# EAGLE board prelab-final (EAGLE 9.7.0)

Size 95.12 x 36.68 mm. Coordinates in mm from the lower left corner, seen from the top.
Outline: 0,0 95.12,0 95.12,36.68 0,36.68 0,0
Copper layers (1*16): Top 0.035mm / dielectric 1.5mm / Bottom 0.035mm
Design rules "default": minimum track width 6mil, minimum drill 0.35mm, track to track 6mil, track to pad 6mil, pad to pad 6mil, via to via 6mil, smd to smd 6mil, copper to edge 40mil, drill to drill 6mil, minimum pad ring 10mil, minimum via ring 8mil, stop-mask expansion 4mil, vias tented up to drill 0mil, thermal gap 10mil

## Footprints (pad centres in the part's own frame; a part is rotated, then mirrored left to right if it is on the bottom)
BATTERY-GENERIC = drill 1.118 pad 3.15 octagon: + 2.54,0; - -2.54,0
RESAD1016W63L850D250B = drill 0.83 pad 1.43: 1 -5.08,0; 2 5.08,0
TO92 = drill 0.813 octagon: 1 -1.27,0; 2 0,1.905; 3 1.27,0

## Placement (x,y rotation side)
FUNC1  FUNCTION-GENERATOR  [BATTERY-GENERIC]  8.26,28.42 180 top
P1  BATTERYGENERIC  [BATTERY-GENERIC]  86.86,27.93 180 top
R1  10k  [RESAD1016W63L850D250B]  23.14,8.87 0 top
R2  1k  [RESAD1016W63L850D250B]  48.54,6.33 0 top
T1  NPN  [TO92]  56.16,8.87 0 top

## Library data of the parts
FUNC1 P1 R1 R2 = Tinkercad
T1 = Tinkercad; CATEGORY: Transistor; SUB-CATEGORY: BJT; TYPE: NPN

## Nets
FUNC1+: FUNC1.+ R1.1
FUNC1-: FUNC1.- P1.- T1.3
P1+: P1.+ R2.1
T1_B: R1.2 T1.2
T1_C: R2.2 T1.1

## Tracks (layer width: path | path; a pad name or v marks a point on that pad's centre or on a via)
FUNC1+  (1 unrouted)
FUNC1-  (2 unrouted)
P1+  (1 unrouted)
T1_B  (1 unrouted)
T1_C  (1 unrouted)